# Altium PCB Kanaloa_v2.0.0_Loko.PcbDoc (part 2 of 2)
Units mil, origin at the board's own origin, x right, y up, seen from the top; angles counter-clockwise.
Board outline 8000 x 8000 mil, 4 copper layers (Top Layer, +24V, GND, Bottom Layer), stack 62 mil thick; 64 components, 140 nets, 806 pads, 72 vias.
Unrouted connection lines stored in the file: 9.
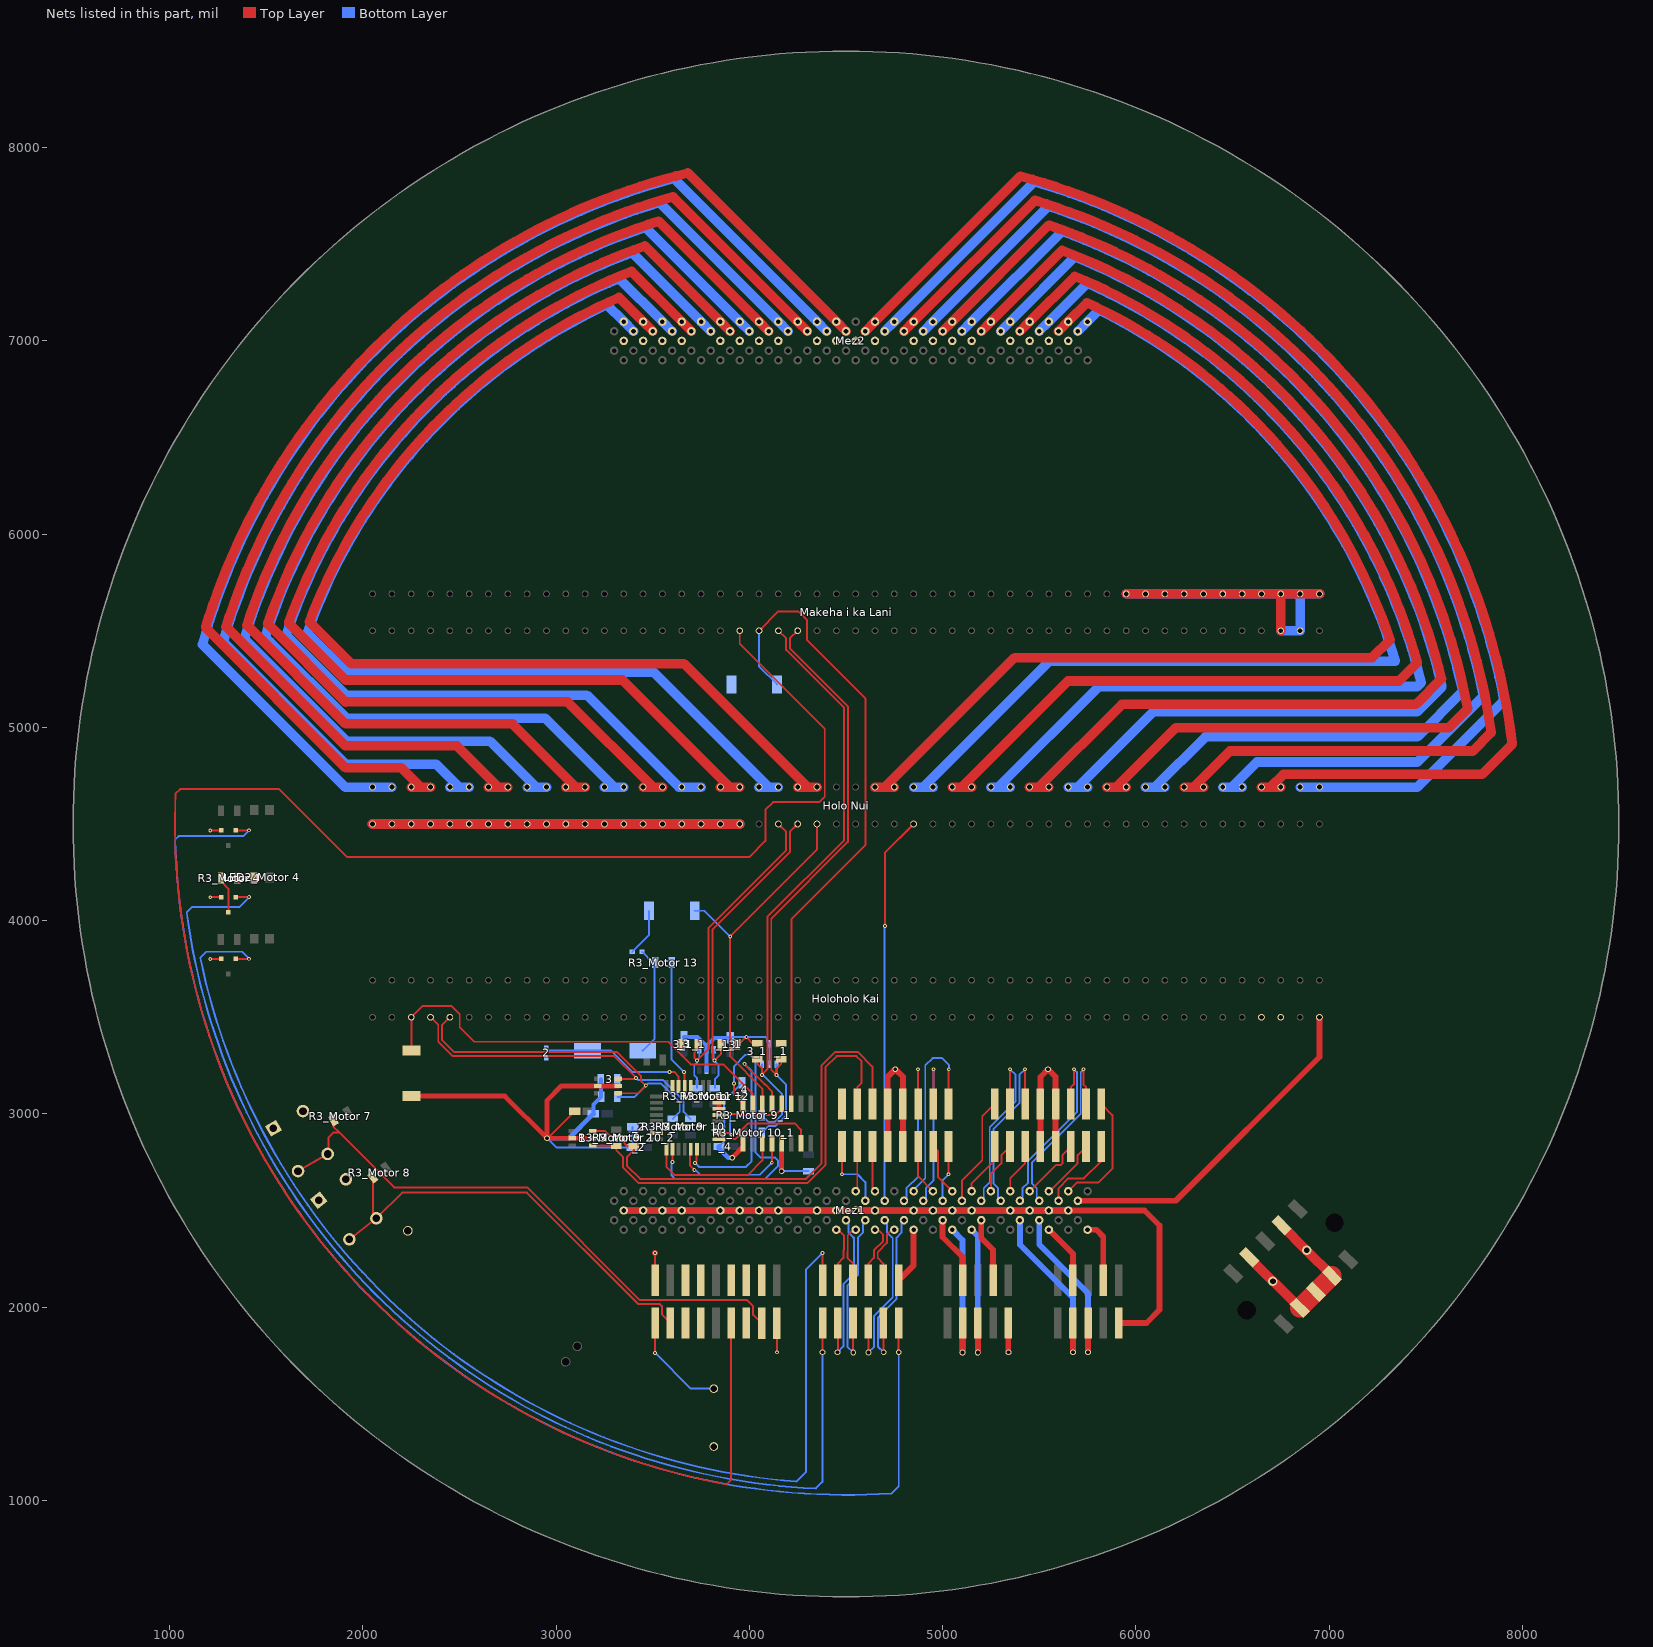
[diagram p4: the nets of this part, all layers, seen from the top]

## Via types
v1: diameter 20, hole 10, Top Layer to Bottom Layer, 47 vias
v2: diameter 30, hole 20, Top Layer to Bottom Layer, 21 vias
v3: diameter 50, hole 30, Top Layer to Bottom Layer, 4 vias

## Nets (pads, with @x,y where several pads share a name; then routed paths per layer and width w, separated by ;. In a path a pad name is that pad's centre, name@x,y a point inside that pad or via, vN(x,y) a via of type N, cw(c..) or ccw(c..) an arc to the next point about the centre after c; other vN are vias at no path point) (continued)
GND: 1.2 1.5 2.2 3.1 3_1.2 3_1_1.1 "Holo Nui.1" "Holo Nui.2" "Holo Nui.3" "Holo Nui.4" "Holo Nui.5" "Holo Nui.6" "Holo Nui.7" "Holo Nui.8" "Holo Nui.9" "Holo Nui.10" "Holo Nui.11" "Holo Nui.12" "Holo Nui.13" "Holo Nui.14" "Holo Nui.15" "Holo Nui.16" "Holo Nui.17" "Holo Nui.18" "Holo Nui.19" "Holo Nui.20" "Holoholo Kai.47" "Holoholo Kai.48" "Makeha i ka Lani.48" "Makeha i ka Lani.49" "Makeha i ka Lani.90" "Makeha i ka Lani.91" "Makeha i ka Lani.92" "Makeha i ka Lani.93" "Makeha i ka Lani.94" "Makeha i ka Lani.95" "Makeha i ka Lani.96" "Makeha i ka Lani.97" "Makeha i ka Lani.98" "Makeha i ka Lani.99" "Makeha i ka Lani.100" ?.1@1536.31,2925.52 ?.1@1772.42,2552.29 ?.1@2232.72,2394.96 ?.1@3095.57,3013 ?.1@3192.57,3000 ?.1@3232.68,3088 ?.1@3393.41,3838 ?.1@3967,2847.64 ?.1@4306,2703.68 ?.2@2251,3092 ?.2@3215.85,3144 ?.2@3481.02,4051 ?.2@3778,3224.85 ?.2@3816,1278.39 ?.2@3906.99,5222 ?.2@4103,3363.15 ?.2@7015.25,2162.62 ?.3@1689.74,3014.1 ?.3@1912.03,2661.36 ?.3@6931.81,2079.19 ?.4@4794.48,3051.47 ?.4@5584.74,3051.47 ?.4@6848.38,1995.75 ?.5@3322.15,3144 ?.5@3778,3331.15 ?.5@4103,3256.85 ?.5@4167,2847.64 ?.5@4715.74,3051.47 ?.5@5339.96,1918 ?.5@5506,3051.47 ?.5@5910.48,1918 ?.7@3519,2900.26 ?.7@6753.62,2424.25 ?.9@4141.96,1916 ?.9@6586.75,2257.38 ?.10@3512.04,2138.47 ?.12@4794.48,2831 ?.12@5584.74,2831 ?.13@4715.74,2831 ?.13@5506,2831 ?.21 ?.22 ?.23 ?.24 ?.28 ?.31 ?.E _1.2 _1_1.1 _2.2 _3.2 _4.2 Mez1.GND Mez2.GND | length 20290.5
  Top Layer w10: v1(1210,3801) 1211.37,3802.37 ?.E@1266.6,3802.37 ; v1(1210,4121) 1210.37,4121.37 ?.E@1266.6,4121.37 ; v1(1210,4467) 1210.37,4467.37 ?.E@1266.6,4467.37 ; v2(2953,2874) 2956.57,2874 ?.1@3095.57,3013 ; ?.10@3512.04,2138.47 v1(3512,2280) ; _1_1.1@3937.32,3360 3946.17,3360 v1(3984,3397.83) 4015.51,3366.32 3_1.2@4041,3366.32 ; ?.9@4141.96,1916 4141.96,1767.04 v1(4143,1766)
  Top Layer w25: ?.2@2251,3092 2735,3092 v2(2953,2874) 2953,3070 3027,3144 ?.2@3215.85,3144 ?.5@3322.15,3144 ; v2@2956.57,2874 1.2@3082.85,2874 1.5@3189.15,2874 ; ?.21@3843,2994.75 ?.22@3843,3026.24 ?.23@3843,3057.74 ?.24@3843,3089.24 ; v2(3911,2773) 3967,2829 ?.1@3967,2847.64 ; v2(4167,2703) ?.5@4167,2847.64
  Top Layer w30: Mez1.GND@3350,2500 Mez1.GND@3450,2500 Mez1.GND@3550,2500 Mez1.GND@3650,2500 Mez1.GND@3850,2500 Mez1.GND@3950,2500 Mez1.GND@4050,2500 Mez1.GND@4150,2500 Mez1.GND@4350,2500 Mez1.GND@4450,2500 Mez1.GND@4550,2500 Mez1.GND@4650,2500 Mez1.GND@4850,2500 Mez1.GND@4950,2500 Mez1.GND@5050,2500 Mez1.GND@5150,2500 Mez1.GND@5350,2500 Mez1.GND@5450,2500 Mez1.GND@5550,2500 Mez1.GND@5650,2500 6045,2500 6123,2422 6123,1986 6055,1918 ?.5@5910.48,1918 ; v1(3512,2280) v1(3512,2280) ; ?.13@4715.74,2831 ?.5@4715.74,3051.47 4715.74,3191.74 v2(4755,3231) 4794.48,3191.52 ?.4@4794.48,3051.47 ?.12@4794.48,2831 ; ?.5@5339.96,1918 5339.96,1767.04 v2(5341,1766) ; ?.13@5506,2831 ?.5@5506,3051.47 5506,3191 v2(5546,3231) 5584.74,3192.26 ?.4@5584.74,3051.47 ?.12@5584.74,2831
  Top Layer w50: 2050,4500 2150,4500 2250,4500 2350,4500 2450,4500 2550,4500 2650,4500 2750,4500 2850,4500 2950,4500 3050,4500 3150,4500 3250,4500 3350,4500 3450,4500 3550,4500 3650,4500 3750,4500 3850,4500 3950,4500 ; 5950,5691 6050,5691 6150,5691 6250,5691 6350,5691 6450,5691 6550,5691 6650,5691 6750,5691 ; ?.9@6586.75,2257.38 ?.4@6848.38,1995.75 ; 6750,5500 6750,5691 ; ?.7@6753.62,2424.25 v3(6883.88,2294) ?.2@7015.25,2162.62 ; 6950,5691 6850,5691 6750,5691
  Top Layer w100: ?.4@6848.38,1995.75 ?.3@6931.81,2079.19 ?.2@7015.25,2162.62
  Bottom Layer w10: v2(2953,2874) 3001,2826 _2.2@3394.57,2826 3395.57,2827 _2.2@3395.57,2933 ; ?.1@3393.41,3838 3481.02,3925.61 ?.2@3481.02,4051 ; _4.2@3842.57,2831 3869,2857.43 3869,3068.43 _4.2@3962,3161.43 ; _3.2@3901,3393.43 3905.4,3397.83 v1(3984,3397.83) 4082.64,3397.83 4091.43,3389.05 4091.43,3374.72 ?.2@4103,3363.15 ?.5@4103,3256.85 ; v2(4167,2703) 4167.68,2703.68 ?.1@4306,2703.68
  Bottom Layer w20: ?.1@3192.57,3000 3192.57,3047.89 ?.1@3232.68,3088 3232.68,3178 3.1@3231.68,3179 ; _3.2@3662,3398.43 3732.11,3398.43 3771.43,3359.12 3771.43,3337.72 ?.5@3778,3331.15 ; ?.2@3778,3224.85 ?.5@3778,3331.15 ; _3.2@3901,3393.43 3818.89,3393.43 3784.57,3359.12 3784.57,3337.72 ?.5@3778,3331.15
  Bottom Layer w25: v2(2953,2874) 3066.57,2874 ?.1@3192.57,3000 ; _4.2@3842.57,2831 3842.57,2821.82 3891.38,2773 v2(3911,2773)
  Bottom Layer w30: Mez1.GND@3350,2500 Mez1.GND@3450,2500 Mez1.GND@3550,2500 Mez1.GND@3650,2500 Mez1.GND@3850,2500 Mez1.GND@3950,2500 Mez1.GND@4050,2500 Mez1.GND@4150,2500 Mez1.GND@4350,2500 Mez1.GND@4450,2500 Mez1.GND@4550,2500 Mez1.GND@4650,2500 Mez1.GND@4850,2500 Mez1.GND@4950,2500 Mez1.GND@5050,2500 Mez1.GND@5150,2500 Mez1.GND@5350,2500 Mez1.GND@5450,2500 Mez1.GND@5550,2500 Mez1.GND@5650,2500
  Bottom Layer w50: 2050,4500 2150,4500 2250,4500 2350,4500 2450,4500 2550,4500 2650,4500 2750,4500 2850,4500 2950,4500 3050,4500 3150,4500 3250,4500 3350,4500 3450,4500 3550,4500 3650,4500 3750,4500 3850,4500 3950,4500 ; 5950,5691 6050,5691 6150,5691 6250,5691 6350,5691 6450,5691 6550,5691 6650,5691 6750,5691 6850,5691 ; 6750,5500 6850,5500 6850,5691 ; 6950,5691 6850,5691
  other v3: 6709,2134
IN: 
KCLK: ?.12@3669.52,2138.47
KDAT: ?.3@3669.52,1918
LAN0: ?.8@4457.52,2138.47 Mez1.47 | length 296.6
  Top Layer w10: Mez1.47@4450,2400 4460,2400 4489,2371 4489,2295.39 4486.89,2293.28 4486.89,2254.37 4457.52,2225 ?.8@4457.52,2138.47
LAN0#: ?.9@4536.26,2138.47 Mez1.51 | length 298.6
  Top Layer w10: ?.9@4536.26,2138.47 4536.26,2225 4506.89,2254.37 4506.89,2285 4509,2287.11 4509,2371 4538,2400 Mez1.51@4550,2400
LAN1: ?.2@4457.52,1918 Mez1.49 | length 891.4
  Top Layer w10: v2(4456.52,1766.48) 4457.52,1767.48 ?.2@4457.52,1918
  Bottom Layer w10: v2(4456.52,1766.48) 4487.02,1796.98 4487.02,2119.28 4542,2174.27 4542,2361 4536.67,2361 4513,2384.67 4513,2437 Mez1.49@4500,2450
LAN1#: ?.3@4536.26,1918 Mez1.53 | length 889.5
  Top Layer w10: ?.3@4536.26,1918 4536.26,1766.74 v2(4537.52,1765.48)
  Bottom Layer w10: v2(4537.52,1765.48) 4507.02,1795.98 4507.02,2111 4562,2165.98 4562,2361 4563.33,2361 4587,2384.67 4587,2437 Mez1.53@4600,2450
LAN2: ?.10@4615,2138.47 Mez1.55 | length 320.2
  Top Layer w10: ?.10@4615,2138.47 4615,2225 4644.37,2254.37 4644.37,2293.28 4692,2340.91 4692,2374 4666,2400 Mez1.55@4650,2400
LAN2#: ?.11@4693.74,2138.47 Mez1.59 | length 316.2
  Top Layer w10: ?.11@4693.74,2138.47 4693.74,2225 4664.37,2254.37 4664.37,2285 4712,2332.63 4712,2374 4738,2400 Mez1.59@4750,2400
LAN3: ?.4@4615,1918 Mez1.57 | length 906.5
  Top Layer w10: ?.4@4615,1918 4615,1832 4616.26,1830.74 v2(4616.26,1765.74)
  Bottom Layer w10: v2(4616.26,1765.74) 4645.63,1795.11 4645.63,1954.28 4742,2050.65 4742,2355.67 4713,2384.67 4713,2437 Mez1.57@4700,2450
LAN3#: ?.5@4693.74,1918 Mez1.61 | length 904.3
  Top Layer w10: ?.5@4693.74,1918 4693.74,1767.26 v2(4695,1766)
  Bottom Layer w10: v2(4695,1766) 4665.63,1795.37 4665.63,1946 4762,2042.37 4762,2359.67 4787,2384.67 4787,2437 Mez1.61@4800,2450
LAN_3V: ?.12@4772.48,2138.47 Mez1.63 | length 293.6
  Top Layer w30: ?.12@4772.48,2138.47 4850,2215.99 Mez1.63@4850,2400
LINKACT: ?.1@4378.78,1918 ?.B@1341.4,4121.37 | length 6090.1
  Top Layer w10: ?.B@1341.4,4121.37 v1(1411.63,4121.37) ; v2(4378,1766) 4378.78,1766.78 ?.1@4378.78,1918
  Bottom Layer w10: v1(1411.63,4121.37) 1360.26,4070 1115.3,4070 1088.21,4042.91 ccw(c4500,4500) 4344.25,1061.25 4378,1095 v2(4378,1766)
linkactr: "LED2_Motor 4.1" "R3_Motor 4.1" | length 88.7
  Top Layer w10: 1353.79,4224 1437.63,4224
  Top Layer w30: 1350.32,4220.53 1353.79,4224
linkc: "R3_Motor 4.2" ?.C@1304,4042.63 | length 193.8
  Top Layer w10: 1265.68,4220.53 1265.68,4203.32 1304,4165 ?.C@1304,4042.63
MCLK: ?.13@3748.26,2138.47
MDAT: ?.4@3748.26,1918
Motor0+: "Holo Nui.67" "Holo Nui.68" Mez2.12 Mez2.14 | length 5463.4
  Bottom Layer w50: Mez2.14@3600,7050 Mez2.12@3550,7100 3326.49,7323.51 ccw(c4500,4500) 1604.09,5481.34 1604.09,5474.91 1912,5167 3158.85,5167 3634.85,4691 3650,4691 3750,4691
Motor0-: "Holo Nui.63" "Holo Nui.64" Mez2.20 Mez2.22 | length 5649
  Bottom Layer w50: 3250,4691 3300,4691 ; 3350,4691 3300,4691 ; Mez2.22@3800,7050 Mez2.20@3750,7100 3392.8,7457.2 ccw(c4500,4500) 1494.13,5467.28 1518.41,5443 1519,5443 1914,5048 2943,5048 3300,4691
Motor1+: "Holo Nui.77" "Holo Nui.78" Mez2.94 Mez2.96 | length 5647.3
  Top Layer w50: 4650,4691 4703,4691 ; 4750,4691 4703,4691 ; Mez2.94@5600,7050 Mez2.96@5650,7100 5747.51,7197.51 5747.62,7197.51 cw(c4500,4500) 7315.11,5453.03 7223.08,5361 5373,5361 4703,4691
Motor1-: "Holo Nui.73" "Holo Nui.74" Mez2.8 Mez2.10 | length 5661
  Top Layer w50: 1723.51,5545.91 1939.43,5330 3661,5330 4300,4691 ; 1723.72,5546.12 cw(c4500,4500) 3325.53,7224.47 Mez2.8@3450,7100 Mez2.10@3500,7050 ; 4250,4691 4300,4691 ; 4350,4691 4300,4691
Motor2+: "Holo Nui.87" "Holo Nui.88" Mez2.82 Mez2.84 | length 5782.6
  Bottom Layer w50: Mez2.82@5300,7050 Mez2.84@5350,7100 5683.26,7433.26 5687.3,7433.26 cw(c4500,4500) 7582.58,5215.13 7582.58,5207.18 7457,5081.6 6090.6,5081.6 5700,4691 ; 5650,4691 5700,4691 ; 5750,4691 5700,4691
Motor2-: "Holo Nui.81" "Holo Nui.82" Mez2.86 Mez2.88 | length 5889.6
  Top Layer w50: 5050,4691 5100,4691 ; 5150,4691 5100,4691 ; Mez2.86@5400,7050 Mez2.88@5450,7100 5684.51,7334.51 cw(c4500,4500) 7456.07,5336.15 7456.07,5334.27 7362,5240.2 5649,5240.2 5649,5240 5100,4691
Motor3+: "Holo Nui.69" "Holo Nui.70" Mez2.16 Mez2.18 | length 5791.7
  Top Layer w50: Mez2.18@3700,7050 Mez2.16@3650,7100 3390.34,7359.66 ccw(c4501.01,4501.01) 1615.64,5540.3 1911,5244.94 3343.06,5244.94 3897,4691 ; 3850,4691 3897,4691 ; 3950,4691 3897,4691
Motor3-: "Holo Nui.65" "Holo Nui.66" Mez2.24 Mez2.26 | length 5921.6
  Top Layer w50: 1507.69,5536.76 cw(c4500,4500) 3459.12,7490.88 Mez2.24@3850,7100 Mez2.26@3900,7050 ; 1508.79,5533.79 1911,5131.57 3059,5132 3500,4691 ; 3450,4691 3500,4691 ; 3550,4691 3500,4691
Motor4+: "Holo Nui.79" "Holo Nui.80" Mez2.98 Mez2.100 | length 5412
  Bottom Layer w50: 4850,4691 4900,4691 ; 4950,4691 4900,4691 ; Mez2.98@5700,7050 Mez2.100@5750,7100 5809.22,7159.22 5810.13,7159.22 cw(c4500,4500) 7342.11,5342.81 ; 7342.11,5342 5551,5342 4900,4691
Motor4-: "Holo Nui.71" "Holo Nui.72" Mez2.4 Mez2.6 | length 5368.4
  Bottom Layer w50: 1713.17,5490.65 cw(c4500,4500) 3263.3,7186.7 Mez2.4@3350,7100 Mez2.6@3400,7050 ; 1714,5486 1914,5286 3505,5286 4100,4691 ; 4050,4691 4100,4691 ; 4150,4691 4100,4691
Motor5+: "Holo Nui.85" "Holo Nui.86" Mez2.78 Mez2.80 | length 6084.2
  Top Layer w50: Mez2.78@5200,7050 Mez2.80@5250,7100 5617.99,7467.99 ; 5450,4691 5500,4691 ; 5550,4691 5500,4691 ; 5619.37,7467.99 cw(c4500,4500) 7581.53,5252.39 7448.54,5119.4 5928.4,5119.4 5500,4691
Motor5-: "Holo Nui.83" "Holo Nui.84" Mez2.90 Mez2.92 | length 5651.9
  Bottom Layer w50: 5250,4691 5290,4691 ; 5350,4691 5290,4691 ; Mez2.90@5500,7050 Mez2.92@5550,7100 5748.55,7298.55 cw(c4500,4500) 7476.02,5230.82 7457,5211.8 5809,5211.8 5290,4692.8 5290,4691
Motor6+: "Holo Nui.59" "Holo Nui.60" Mez2.28 Mez2.30 | length 5775.1
  Bottom Layer w50: 2850,4691 2895,4691 ; 2950,4691 2895,4691 ; Mez2.30@4000,7050 Mez2.28@3950,7100 3462.09,7587.91 ccw(c4500,4500) 1387.47,5461.55 1387.47,5456.53 1915,4929 2657,4929 2895,4691
Motor6-: "Holo Nui.61" "Holo Nui.62" Mez2.32 Mez2.34 | length 6053.8
  Top Layer w50: 1399.51,5529.16 cw(c4500,4500) 3530.38,7619.62 Mez2.32@4050,7100 Mez2.34@4100,7050 ; 1399.97,5529.01 1910.98,5018 2774,5018 3101,4691 ; 3050,4691 3101,4691 ; 3150,4691 3101,4691
Motor7+: "Holo Nui.93" "Holo Nui.94" Mez2.62 Mez2.64 | length 6544.2
  Top Layer w50: Mez2.62@4800,7050 Mez2.64@4850,7100 5477.32,7727.32 cw(c4500,4500) 7838.74,4972.82 7743.72,4877.8 6486.8,4877.8 6300,4691 ; 6250,4691 6300,4691 ; 6350,4691 6300,4691
Motor7-: "Holo Nui.57" "Holo Nui.58" Mez2.40 Mez2.42 | length 6177.6
  Top Layer w50: 1291.71,5520.99 cw(c4500,4500) 3604.46,7745.54 Mez2.40@4250,7100 Mez2.42@4300,7050 ; 1294.2,5520.2 1910,4904.39 2487,4904 2700,4691 ; 2650,4691 2700,4691 ; 2750,4691 2700,4691
Motor8+: "Holo Nui.89" "Holo Nui.90" Mez2.70 Mez2.72 | length 6330.6
  Top Layer w50: Mez2.70@5000,7050 Mez2.72@5050,7100 5548.53,7598.53 ; 5551.41,7598.53 cw(c4500,4500) 7717.27,5096.24 7619.63,4998.6 6207.6,4998.6 5900,4691 ; 5850,4691 5900,4691 ; 5950,4691 5900,4691
Motor8-: "Holo Nui.91" "Holo Nui.92" Mez2.74 Mez2.76 | length 5917.1
  Bottom Layer w50: Mez2.74@5100,7050 Mez2.76@5150,7100 5616.82,7566.82 5618.57,7566.82 cw(c4500,4500) 7690.23,5192.1 ; 6050,4691 6099,4691 ; 6150,4691 6099,4691 ; 7690.3,5184.7 7457,4951.4 6359.4,4951.4 6099,4691
Motor9+: "Holo Nui.53" "Holo Nui.54" Mez2.48 Mez2.50 | length 6297.1
  Top Layer w50: 1186,5518 cw(c4500,4500) 3681.24,7868.76 Mez2.48@4450,7100 Mez2.50@4500,7050 ; 1187,5515 1911,4791 2199,4791 2299,4691 ; 2250,4691 2299,4691 ; 2350,4691 2299,4691
Motor9-: "Holo Nui.55" "Holo Nui.56" Mez2.36 Mez2.38 | length 5901.9
  Bottom Layer w50: 1277.62,5443.52 cw(c4500,4500) 3534.22,7715.78 Mez2.36@4150,7100 Mez2.38@4200,7050 ; 1283.58,5436.42 1910,4810 2378,4810 2497,4691 ; 2450,4691 2497,4691 ; 2550,4691 2497,4691
Motor10+: "Holo Nui.99" "Holo Nui.100" Mez2.58 Mez2.60 | length 6147.2
  Bottom Layer w50: Mez2.58@4700,7050 Mez2.60@4750,7100 5474.3,7824.3 5475.38,7824.3 cw(c4500,4500) 7905,5139.01 7457,4691 6950,4691 6850,4691
Motor10-: "Holo Nui.51" "Holo Nui.52" Mez2.44 Mez2.46 | length 5992.9
  Bottom Layer w50: 2150,4691 2050,4691 1908,4691 1170,5429 cw(c4500,4500) 3609.5,7840.5 Mez2.44@4350,7100 Mez2.46@4400,7050
Motor11+: "Holo Nui.95" "Holo Nui.96" Mez2.66 Mez2.68 | length 6058.2
  Bottom Layer w50: Mez2.66@4900,7050 Mez2.68@4950,7100 5547.29,7697.29 cw(c4500,4500) 7798.45,5163.09 ; 6450,4691 6497,4691 ; 6550,4691 6497,4691 ; 7793.9,5158.1 7457,4821.2 6627.2,4821.2 6497,4691
Motor11-: "Holo Nui.97" "Holo Nui.98" Mez2.54 Mez2.56 | length 6699.1
  Top Layer w50: Mez2.54@4600,7050 Mez2.56@4650,7100 5402.67,7852.67 cw(c4500,4500) 7947.04,4916.01 ; 6650,4691 6698,4691 ; 6750,4691 6698,4691 ; 7946.5,4912.5 7791,4757 6764,4757 6698,4691
OC1#: ?.10@3602.26,2817 ?.16@3967,3052.36 | length 1723.1
  Top Layer w10: v1(3602.26,2750.26) ?.10@3602.26,2817 ; v1(3921,3158) 3921,3098.36 ?.16@3967,3052.36
  Bottom Layer w10: v1(3602.26,2750.26) 3598,2746 3598,2681 3617,2662 4079,2662 4148.5,2731.5 4148.5,2758.5 4132,2775 4057,2775 4031.41,2800.59 4031.41,3278.59 4005,3305 3979.64,3305 3921,3246.36 v1(3921,3158)
OC2#: ?.13@4117,3052.36 ?.14@3728.24,2817 | length 1177.7
  Top Layer w10: v1(3718,2745) 3727,2754 3727,2815.76 ?.14@3728.24,2817 ; v1(3974,3259) 3974,3257.64 4078.64,3153 4081,3153 4117,3117 ?.13@4117,3052.36
  Bottom Layer w10: v1(3718,2745) 3721.64,2745 3741.64,2725 3982,2725 4011.41,2754.41 4011.41,3222 3974.41,3259 v1(3974,3259)
OC3#: ?.12@4167,3052.36 ?.18@3843,2900.26 | length 487.4
  Top Layer w10: ?.18@3843,2900.26 3897.74,2900.26 v1(3906,2892) ; v1(3899,3000) 3943.03,3000 3948.98,2994.06 4135.02,2994.06 4167,3026.03 ?.12@4167,3052.36
  Bottom Layer w10: v1(3899,3000) 3900,2999 3900,2898 v1(3906,2892)
PS-ON#: "Makeha i ka Lani.20" ?.6@3905.74,1918 | length 10615.3
  Top Layer w10: ?.6@3905.74,1918 3905.74,1106 3882.54,1082.8 cw(c4500,4500) 1031.07,4658.07 1054,4681 1567,4681 1919,4329 3999,4329 4082.5,4412.5 4082.5,4572.5 4123,4613 4362,4613 4390,4641 4390,4993 3950,5433 3950,5500
PSon: 
PWRBTN#: "R3_Motor 7.2" ?.2@1664.26,2703.9 ?.4@1817.69,2792.48 ?.8@4063.22,1916 | length 3055.1
  Top Layer w10: ?.2@1664.26,2703.9 ?.4@1817.69,2792.48 ; ?.4@1821.69,2788.48 1821.69,2876 1849.69,2904 1877,2904 ; 1847.35,2966.84 1847.35,2939.53 ; 1866.16,2958.35 1847.35,2939.53 ; ?.8@4063.22,1916 4019.17,1960.05 4019.17,2004.92 3988.09,2036 3433.28,2036 2850.14,2619.14 2161.86,2619.14 1877,2904 ; 1847.35,2939.53 1847.35,2933.65 1877,2904
PWRON/EN2: ?.4@4117,2847.64 ?.13@3696.75,2817 | length 656.6
  Top Layer w10: ?.13@3696.75,2817 3692,2812.25 3692,2733 v1(3715,2710) ; v1(4116,2747) 4116,2846.64 ?.4@4117,2847.64
  Bottom Layer w10: v1(3715,2710) 3719.64,2710 3744.64,2685 4054,2685 v1(4116,2747)
PWRON/EN3: ?.7@4267,2847.64 ?.17@3843,2868.76 | length 550.5
  Top Layer w10: ?.17@3843,2868.76 3927.95,2868.76 3940.19,2881 3940.19,2897.16 3992.03,2949 4237,2949 4267,2919 ?.7@4267,2847.64
"PWRON/EN 1": ?.3@4067,2847.64 ?.9@3570.76,2817 | length 725
  Top Layer w10: ?.9@3570.76,2817 3570.76,2726.24 3614,2683 3991,2683 4067,2759 ?.3@4067,2847.64
RI: ?.9@5831.74,2138.47 Mez1.99 | length 322.3
  Top Layer w30: Mez1.99@5750,2400 5796,2400 5831.74,2364.26 ?.9@5831.74,2138.47
RI_2: ?.9@5261.22,2138.47 Mez1.77 | length 336.9
  Top Layer w30: Mez1.77@5200,2450 5200,2358 5261.22,2296.78 ?.9@5261.22,2138.47
RSTBTN#: "R3_Motor 8.2" ?.2@1929.97,2350.64 ?.2@3590.78,1918 ?.4@2069.58,2459.71 | length 2279.8
  Top Layer w10: ?.2@1931.97,2351.64 ?.4@2069.85,2459.36 ; 2051.65,2669.94 2051.65,2477.64 ?.4@2069.58,2459.71 ; ?.2@3590.78,1918 3546.73,1962.05 3546.73,2004.92 3535.65,2016 3425,2016 2849,2592 2202.49,2592 ?.4@2071.58,2461.09 ; ?.4@2069.58,2459.71 ?.4@2071.58,2460.71 ; ?.4@2069.58,2459.71 ?.4@2071.58,2460.71 ; ?.4@2069.85,2459.36 ?.4@2071.58,2461.09 ; ?.4@2069.85,2459.36 ?.4@2071.58,2460.71 ; ?.4@2071.58,2460.71 ?.4@2071.58,2461.09
RTS: ?.7@5674.26,2138.47 Mez1.91 | length 313
  Top Layer w30: Mez1.91@5550,2400 5674.26,2275.74 ?.7@5674.26,2138.47
RTS_2: ?.7@5103.74,2138.47 Mez1.69 | length 354.5
  Top Layer w30: Mez1.69@5000,2450 5000,2363 5103.74,2259.26 ?.7@5103.74,2138.47
RXD: ?.2@5674.26,1918 Mez1.85 | length 949.1
  Top Layer w30: v2(5674.26,1766.26) ?.2@5674.26,1918
  Bottom Layer w30: Mez1.85@5400,2450 5400,2323 5674.26,2048.74 v2(5674.26,1766.26)
RXD_2: ?.2@5103.74,1918 Mez1.71 | length 809.3
  Top Layer w30: v2(5103.52,1765.48) 5103.74,1765.7 ?.2@5103.74,1918
  Bottom Layer w30: Mez1.71@5050,2400 5103.52,2346.48 v2(5103.52,1765.48)
S3.3V: ?.7@3984.48,1918
SMBALERT#: ?.17@4063.22,2138.47
SMBCLK: ?.15@3905.74,2138.47
SMBDAT: ?.16@3984.48,2138.47
Speaker: ?.1@3512.04,1918 ?.1@3816,1577.61 | length 538.4
  Top Layer w10: v1(3512.04,1762.96) ?.1@3512.04,1918
  Bottom Layer w10: v1(3512.04,1762.96) 3696.39,1578.61 ?.1@3819,1578.61
SPEED100: ?.6@4772.48,1918 ?.B@1341.4,4467.37 | length 6979.2
  Top Layer w10: ?.B@1341.4,4467.37 v1(1411.37,4467.37) ; ?.6@4772.48,1918 4772.48,1766.52 v2(4773,1766)
  Bottom Layer w10: v1(1411.37,4467.37) 1381,4437 1046,4437 1029.04,4420.04 ccw(c4500,4500) 4736.16,1036.16 4773,1073 v2(4773,1766)
SPEED1000: ?.7@4378.78,2138.47 ?.B@1341.4,3802.37 | length 6139.6
  Top Layer w10: ?.B@1341.4,3802.37 v1(1411.37,3802.37) ; ?.7@4378.78,2138.47 4379,2138.69 v1(4379,2280)
  Bottom Layer w10: v1(1411.37,3802.37) 1374.74,3839 1188.36,3839 1158.07,3808.71 ccw(c4500,4500) 4243.56,1096.97 4292,1145.41 4292,2193 v1(4379,2280)
TEMP: "Holoholo Kai.50" Mez1.98 | length 1764.2
  Top Layer w30: Mez1.98@5700,2550 6206,2550 6950,3294 6950,3500
temporarynet: 
TXD: ?.3@5753,1918 Mez1.89 | length 940.8
  Top Layer w30: v2(5753,1766) ?.3@5753,1918
  Bottom Layer w30: Mez1.89@5500,2450 5500,2324 5753,2071 v2(5753,1766)
TXD_2: ?.3@5182.48,1918 Mez1.75 | length 800
  Top Layer w30: v2(5182.26,1765.74) 5182.48,1765.96 ?.3@5182.48,1918
  Bottom Layer w30: Mez1.75@5150,2400 5182.26,2367.74 v2(5182.26,1765.74)
USB5V_HK: "Holoholo Kai.3" ?.1@2251,3328 ?.15@4017,3052.36 | length 2244.4
  Top Layer w10: ?.1@2251,3328 2251,3499 2250,3500 2309,3559 2458,3559 2501,3516 2501,3447 2575,3373 3579,3373 3696,3256 3865,3256 4017,3104 ?.15@4017,3052.36
USB5V_HN: "Holo Nui.24" ?.1@3717.02,4051 ?.14@4067,3052.36 | length 1942.7
  Top Layer w10: ?.14@4067,3052.36 4067,3130 3900,3297 3900,3919 4350,4369 4350,4500
  Bottom Layer w10: ?.1@3717.02,4051 3767,4051 v1(3901,3917)
USB5V_ML: "Makeha i ka Lani.21" ?.1@4142.99,5222 ?.11@4217,3052.36 | length 3413.2
  Top Layer w10: 4050,5500 4150,5600 4254,5600 4298,5556 4298,5453 4602,5149 4602,4392 4217,4007 ?.11@4217,3052.36
  Bottom Layer w10: 4050,5500 4050,5314.99 ?.1@4142.99,5222
USB_5V_1: ?.16@4479.52,2831 Mez1.54 | length 377.7
  Top Layer w10: v1(4479.52,2687.52) ?.16@4479.52,2831
  Bottom Layer w10: v1(4479.52,2687.52) 4559.48,2687.52 4600,2647 Mez1.54@4600,2550
USB_5V_2: ?.9@5030.7,2831 Mez1.70 | length 293.7
  Top Layer w10: v1(5030.7,2687.3) ?.9@5030.7,2831
  Bottom Layer w10: Mez1.70@5000,2550 5000,2656.6 v1(5030.7,2687.3)
USB_5V_3: ?.16@5269.78,2831 Mez1.76 | length 280.6
  Top Layer w10: Mez1.76@5150,2600 5150,2640 5269.78,2759.78 ?.16@5269.78,2831
USB_5V_4: ?.9@5820.96,2831 Mez1.94 | length 419.4
  Top Layer w10: Mez1.94@5600,2550 5600,2615 5651,2666 5731,2666 5820.96,2755.96 ?.9@5820.96,2831
USB_5V_5: ?.1@5820.96,3051.47 Mez1.96 | length 636
  Top Layer w10: Mez1.96@5650,2600 5694,2644 5806,2644 5879,2717 5879,2993.43 ?.1@5820.96,3051.47
USB_5V_6: ?.8@5269.78,3051.47 Mez1.74 | length 571.8
  Top Layer w10: Mez1.74@5100,2550 5100,2655 5205,2760 5205,2986.69 ?.8@5269.78,3051.47
USB_5V_7: ?.1@5030.7,3051.47 Mez1.64 | length 1031.2
  Top Layer w10: ?.1@5030.7,3051.47 5030.7,3229.7 v1(5032,3231)
  Bottom Layer w10: Mez1.64@4850,2600 4850,2608 4910,2668 4910,3251 4948,3289 4997,3289 5032,3254 v1(5032,3231)
USB_5V_8: ?.8@4479.52,3051.47
USB_DM_1: ?.14@4637,2831 Mez1.56 | length 236.4
  Top Layer w10: ?.14@4637,2831 4637,2613 Mez1.56@4650,2600
USB_DM_2: ?.11@4873.22,2831 Mez1.68 | length 262.8
  Top Layer w10: ?.11@4873.22,2831 4873.22,2676.78 Mez1.68@4950,2600
USB_DM_3: ?.14@5427.26,2831 Mez1.84 | length 263
  Top Layer w10: Mez1.84@5350,2600 5350,2667.74 5427.26,2745 ?.14@5427.26,2831
USB_DM_4: ?.11@5663.48,2831 Mez1.88 | length 334.3
  Top Layer w10: Mez1.88@5450,2600 5585.29,2735.29 5610.64,2735.29 5619.43,2744.08 5619.43,2786.95 ?.11@5663.48,2831
USB_DM_5: ?.3@5663.48,3051.47 Mez1.86 | length 995.8
  Top Layer w10: ?.3@5663.48,3051.47 5663.48,3138 5680,3154.52 v1(5680,3231)
  Bottom Layer w10: Mez1.86@5400,2550 5413,2563 5413,2615.33 5442,2644.33 5442,2756.28 5695,3009.28 5695,3216 v1(5680,3231)
USB_DM_6: ?.6@5427.26,3051.47 Mez1.82 | length 943.1
  Top Layer w10: v1(5427,3231) 5427,3138.26 5427.26,3138 ?.6@5427.26,3051.47
  Bottom Layer w10: Mez1.82@5300,2550 5287,2563 5287,2615.33 5264,2638.33 5264,2922.22 5397.5,3055.72 5397.5,3201.5 v1(5427,3231)
USB_DM_7: ?.3@4873.22,3051.47 Mez1.62 | length 890.9
  Top Layer w10: v1(4873,3231) 4873.22,3230.78 ?.3@4873.22,3051.47
  Bottom Layer w10: Mez1.62@4800,2550 4813,2563 4813,2615.33 4873,2675.33 v1(4873,3231)
USB_DM_8: 1.6 "R3_Motor 10_2.1" ?.6@4637,3051.47 | length 2457.8
  Top Layer w10: 1.6@3189.15,2911.4 3252.42,2911.4 3277.23,2886.59 3323.59,2886.59 3353.56,2856.62 3353.56,2849.12 3369,2833.68 3402,2833.68 3402,2811 3366.5,2775.5 3366.5,2730.5 3434,2663 4293,2663 4373,2743 4373,3249.28 4442.72,3319 4562.28,3319 4637,3244.29 ?.6@4637,3051.47
USB_DP_1: ?.15@4558.26,2831 Mez1.52 | length 234.4
  Top Layer w10: Mez1.52@4550,2600 4558.26,2608.26 ?.15@4558.26,2831
USB_DP_2: ?.10@4951.96,2831 Mez1.72 | length 271.6
  Top Layer w10: ?.10@4951.96,2831 4977,2805.96 4977,2673 Mez1.72@5050,2600
USB_DP_3: ?.15@5348.52,2831 Mez1.80 | length 274.8
  Top Layer w10: Mez1.80@5253,2600 Mez1.80@5250,2600 5250,2689.61 5304.47,2744.08 5304.47,2786.95 ?.15@5348.52,2831
USB_DP_4: ?.10@5742.22,2831 Mez1.92 | length 313
  Top Layer w10: Mez1.92@5550,2600 5554.09,2600 5698.17,2744.08 5698.17,2786.95 ?.10@5742.22,2831
USB_DP_5: ?.2@5742.22,3051.47 Mez1.90 | length 992.3
  Top Layer w10: v1(5730,3231) 5730,3150.22 5742.22,3138 ?.2@5742.22,3051.47
  Bottom Layer w10: Mez1.90@5500,2550 5487,2563 5487,2615.33 5462,2640.33 5462,2748 5715,3001 5715,3216 v1(5730,3231)
USB_DP_6: ?.7@5348.52,3051.47 Mez1.78 | length 946.5
  Top Layer w10: v1(5348,3231) 5348.52,3230.48 ?.7@5348.52,3051.47
  Bottom Layer w10: Mez1.78@5200,2550 5213,2563 5213,2615.33 5244,2646.33 5244,2930.5 5377.5,3064 5377.5,3201.5 v1(5348,3231)
USB_DP_7: ?.2@4951.96,3051.47 Mez1.66 | length 882.1
  Top Layer w10: ?.2@4951.96,3051.47 v1(4952,3231) v1(4952,3231)
  Bottom Layer w10: Mez1.66@4900,2550 4913,2563 4913,2615.33 4952,2654.33 v1(4952,3231)
USB_DP_8: 1.4 "R3_Motor 9_2.1" ?.7@4558.26,3051.47 | length 2326
  Top Layer w10: 1.4@3189.15,2836.6 3275.08,2836.6 3278,2833.68 3311,2833.68 3311,2811 3346.5,2775.5 3346.5,2722.22 3425.72,2643 4301.28,2643 4393,2734.72 4393,3241 4451,3299 4554,3299 4581,3272 4581,3160.74 4558.26,3138 ?.7@4558.26,3051.47
USBDM_HK: "Holoholo Kai.5" "R3_Motor 9.1" ?.2@3317.32,3088 ?.4@3322.15,3106.6 | length 1950.4
  Top Layer w10: 2450,3500 2410,3460 2410,3381 2472,3319 3316.36,3319 3439,3196.36 3439,3171 v1(3464,3146) 3424.6,3106.6 ?.4@3322.15,3106.6
  Bottom Layer w10: ?.2@3317.32,3088 3406,3088 v1(3464,3146) 3474,3156 3543.5,3156 3639.5,3060 3639.5,3009.82 3604,2974.32
USBDM_HN: 3_1_1.2 "Holo Nui.22" "R3_Motor 11.1" ?.4@3740.6,3331.15 | length 1738.4
  Top Layer w10: 3_1_1.2@3725.32,3360 3725.32,3327 3715,3316.68 3715,3291 v1(3729,3277) 3789,3337 3789,3962 4190,4363 4190,4460 4150,4500
  Bottom Layer w10: 3730,3133.32 3730,3183.72 3714.77,3198.95 3714.77,3250.75 3729,3264.98 v1(3729,3277) 3740.6,3288.6 ?.4@3740.6,3331.15
USBDM_ML: "Makeha i ka Lani.23" "R3_Motor 10_1.1" ?.4@4140.4,3256.85 _1.1 | length 3152.8
  Top Layer w10: _1.1@4165,3281.68 4165,3259 4140,3234 v1(4140,3202) 4113,3229 4113,4010.72 4510,4407.72 4510,5109 4210,5409 4210,5460 4250,5500
  Bottom Layer w10: 4064.32,2902 4099.82,2937.5 4136.28,2937.5 4189,2990.22 4189,3153 v1(4140,3202) 4140,3231.6 4140.4,3232 ?.4@4140.4,3256.85
USBDP_HK: 3.2 "Holoholo Kai.4" "R3_Motor 10.1" ?.6@3322.15,3181.4 | length 1842.5
  Top Layer w10: 2350,3500 2390,3460 2390,3372.72 2463.72,3299 3301,3299 v1(3414,3186) 3409.4,3181.4 ?.6@3322.15,3181.4
  Bottom Layer w10: 3.2@3316.32,3179 3407,3179 v1(3414,3186) 3424,3176 3551.78,3176 3659.5,3068.28 3659.5,3009.82 3695,2974.32
USBDP_HN: "Holo Nui.23" "R3_Motor 12.1" ?.6@3815.4,3331.15 _1_1.2 | length 1723.7
  Top Layer w10: _1_1.2@3852.68,3360 3852.68,3309.68 v1(3820,3277) 3809,3288 3809,3953.72 4210,4354.72 4210,4460 4250,4500
  Bottom Layer w10: ?.6@3815.4,3331.15 3815.4,3281.6 v1(3820,3277) 3820,3271.98 3841.23,3250.75 3841.23,3198.95 3821,3178.72 3821,3133.32
USBDP_ML: 3_1.1 "Makeha i ka Lani.22" "R3_Motor 9_1.1" ?.6@4065.6,3256.85 | length 3144.9
  Top Layer w10: 3_1.1@4041,3281.68 4041,3259 4065,3235 v1(4065,3202) 4093,3230 4093,4019 4490,4416 4490,5100.72 4190,5400.72 4190,5460 4150,5500
  Bottom Layer w10: 4064.32,2993 4099.82,2957.5 4128,2957.5 4169,2998.5 4169,3102 4069,3202 v1(4065,3202) 4065.6,3202.6 ?.6@4065.6,3256.85
"W H O K I L L": "Holo Nui.29" Mez1.58 | length 2017.7
  Top Layer w10: v1(4701,3972) 4701,4351 4850,4500
  Bottom Layer w10: Mez1.58@4700,2550 v1@4700,3978
XTAL1: 2.1 ?.1@3162.36,3327 ?.30 | length 798
  Top Layer w10: v1(3586,3217) 3610,3217 3633.76,3193.24 ?.30@3633.76,3141
  Bottom Layer w10: 2.1@2949,3340.59 2962.59,3327 3285,3327 3395,3217 v1(3586,3217)
XTAL2: "R3_Motor 13.2" ?.29 | length 670.1
  Top Layer w10: v1(3662,3216) 3665.25,3212.75 ?.29@3665.25,3141
  Bottom Layer w10: 3597.32,3783 3597.32,3280.68 v1(3662,3216)
xtal2_r: "R3_Motor 13.1" ?.2@3444.59,3838 ?.2@3447.8,3327 | length 573.7
  Bottom Layer w10: ?.2@3444.59,3838 3499.59,3783 3512.68,3783 3509.8,3780.12 3509.8,3389 ?.2@3447.8,3327
pads on no net: 1.1 1.3 "Holo Nui.25" "Holo Nui.26" "Holo Nui.27" "Holo Nui.28" "Holo Nui.30" "Holo Nui.75" "Holo Nui.76" "Holoholo Kai.6" "Holoholo Kai.7" "Holoholo Kai.8" "Holoholo Kai.9" "Holoholo Kai.10" "Holoholo Kai.11" "Holoholo Kai.12" "Holoholo Kai.13" "Holoholo Kai.14" "Holoholo Kai.15" "Holoholo Kai.16" "Holoholo Kai.17" "Holoholo Kai.18" "Holoholo Kai.19" "Holoholo Kai.20" "Holoholo Kai.21" "Holoholo Kai.22" "Holoholo Kai.23" "Holoholo Kai.24" "Holoholo Kai.25" "Holoholo Kai.26" "Holoholo Kai.27" "Holoholo Kai.28" "Holoholo Kai.29" "Holoholo Kai.30" "Holoholo Kai.31" "Holoholo Kai.32" "Holoholo Kai.33" "Holoholo Kai.34" "Holoholo Kai.35" "Holoholo Kai.36" "Holoholo Kai.37" "Holoholo Kai.38" "Holoholo Kai.39" "Holoholo Kai.40" "Holoholo Kai.41" "Holoholo Kai.42" "Holoholo Kai.43" "Holoholo Kai.44" "Holoholo Kai.45" "Holoholo Kai.46" "Holoholo Kai.51" "Holoholo Kai.52" "Holoholo Kai.53" "Holoholo Kai.54" "Holoholo Kai.55" "Holoholo Kai.56" "Holoholo Kai.57" "Holoholo Kai.58" "Holoholo Kai.59" "Holoholo Kai.60" "Holoholo Kai.61" "Holoholo Kai.62" "Holoholo Kai.63" "Holoholo Kai.64" "Holoholo Kai.65" "Holoholo Kai.66" "Holoholo Kai.67" "Holoholo Kai.68" "Holoholo Kai.69" "Holoholo Kai.70" "Holoholo Kai.71" "Holoholo Kai.72" "Holoholo Kai.73" "Holoholo Kai.74" "Holoholo Kai.75" "Holoholo Kai.76" "Holoholo Kai.77" "Holoholo Kai.78" "Holoholo Kai.79" "Holoholo Kai.80" "Holoholo Kai.81" "Holoholo Kai.82" "Holoholo Kai.83" "Holoholo Kai.84" "Holoholo Kai.85" "Holoholo Kai.86" "Holoholo Kai.87" "Holoholo Kai.88" "Holoholo Kai.89" "Holoholo Kai.90" "Holoholo Kai.91" "Holoholo Kai.92" "Holoholo Kai.93" "Holoholo Kai.94" "Holoholo Kai.95" "Holoholo Kai.96" "Holoholo Kai.97" "Holoholo Kai.98" "Holoholo Kai.99" "Holoholo Kai.100" "Makeha i ka Lani.6" "Makeha i ka Lani.7" "Makeha i ka Lani.13" "Makeha i ka Lani.14" "Makeha i ka Lani.15" "Makeha i ka Lani.16" "Makeha i ka Lani.17" "Makeha i ka Lani.18" "Makeha i ka Lani.19" "Makeha i ka Lani.24" "Makeha i ka Lani.25" "Makeha i ka Lani.26" "Makeha i ka Lani.27" "Makeha i ka Lani.28" "Makeha i ka Lani.39" "Makeha i ka Lani.40" "Makeha i ka Lani.41" ?.1@3215.85,3181.4 ?.1@3815.4,3224.85 ?.1@4065.6,3363.15 ?.3@3215.85,3106.6 ?.3@3740.6,3224.85 ?.3@4140.4,3363.15 ?.4@3519,2994.75 ?.5@3519,2963.25 ?.8@4317,2847.64 ?.8@6670.19,2340.81 ?.9@4317,3052.36 ?.10@4267,3052.36 ?.11@3590.78,2138.47 ?.14@3827,2138.47 ?.15@7027.98,2436.98 ?.16@6574.02,1983.02 ?.26 ?.32 Mez1.1 Mez1.2 Mez1.3 Mez1.4 Mez1.5 Mez1.6 Mez1.7 Mez1.8 Mez1.9 Mez1.10 Mez1.11 Mez1.12 Mez1.13 Mez1.14 Mez1.15 Mez1.16 Mez1.17 Mez1.18 Mez1.19 Mez1.20 Mez1.21 Mez1.22 Mez1.23 Mez1.24 Mez1.25 Mez1.26 Mez1.27 Mez1.28 Mez1.29 Mez1.30 Mez1.31 Mez1.32 Mez1.33 Mez1.34 Mez1.35 Mez1.36 Mez1.37 Mez1.38 Mez1.39 Mez1.40 Mez1.41 Mez1.42 Mez1.43 Mez1.44 Mez1.45 Mez1.46 Mez1.48 Mez1.50 Mez1.60 Mez2.52 Mez2.95 Mez2.99

## Polygon pours and split planes (outlines as drawn)
+24V on +24V (split plane): 457 vertices, not listed, extent 520.01,520.01 8479.99,8479.99
GND on GND (split plane): 457 vertices, not listed, extent 520.01,520.01 8479.99,8479.99

## Other copper
Top Layer:
  region net BAT1: 3295,6878 3390,6973 3908,6973 4003,6878
  region net "EXT PWR": 4599,6878 4692,6971 5209,6971 5302,6878
  region net "EXT PWR": 4599,6878 4601,6876 4601,5688 5847,5688 5850,5691 5302,6239 5302,6878
  region net BAT1: 4003,6878 4003,6444 3250,5691 2108,5691 3295,6878
Bottom Layer:
  rectangle net +5V: 4350,4083 4650,4386
  rectangle net +5V: 4786,5734 5508,5832
  rectangle net +5V: 5300,6830 5600,6878
  rectangle net +5V: 5204,5823 5508,6012
  region net +5V: 4832,4725 5471,5364 5471,5521 4850,5521 4188,4859 4188,4725
  region net BAT2: 3947,6971 4040,6878 4556,6878 4649,6971
  region net BAT2: 4100,6950 3350,6200 3350,5691 4550,5691 4600,5741 4600,6950
  region net +5V: 5248,6971 5653,6971 5600,6878 5300,6876

## Silkscreen, mask and mechanical layers (free items; w line width, h text height)
Top Overlay:
  drawing of 4317 lines, arcs and shapes, not listed
  text "Computer Power" at 1457,3098 h30
  text "Computer Reset" at 2060,2886 h30 r308
  text "Kanaloa" at 4233,1556 h120
  text "Loko Backplane" at 4230,1357 h120
Bottom Overlay:
  circle w10: c4500,4500 r4000

## Text inside footprints (layer, text, board x,y; h text height)
"Holo Nui": Top Overlay "1" at 1790,4467 h60; Top Overlay "51" at 1727,4665 h60; Top Overlay "50" at 7157,4459 h60; Top Overlay "100" at 7157,4670 h60
"Holoholo Kai": Top Overlay "100" at 7157,3670 h60; Top Overlay "50" at 7157,3459 h60; Top Overlay "51" at 1720,3665 h60; Top Overlay "1" at 1766,3466 h60
"Makeha i ka Lani": Top Overlay "100" at 7157,5670 h60; Top Overlay "50" at 7157,5459 h60; Top Overlay "51" at 1713,5663 h60; Top Overlay "1" at 1766,5466 h60
Mez1: Bottom Overlay "1" at 3164,2418 h60; Bottom Overlay "2" at 3164,2525 h60; Bottom Overlay "4" at 3373,2673 h60; Bottom Overlay "3" at 3372,2268 h60
Mez2: Bottom Overlay "1" at 3164,6918 h60; Bottom Overlay "2" at 3164,7025 h60; Bottom Overlay "4" at 3373,7173 h60; Bottom Overlay "3" at 3372,6768 h60
?: Top Overlay "+" at 3866,1547.61 h60; Top Overlay "-" at 3866,1248.39 h60